# Altium PCB Voltage detect V4.PcbDoc
Units mm, origin at the board's own origin, x right, y up, seen from the top; angles counter-clockwise.
Board outline 95 x 53 mm, 2 copper layers (Top Layer, Bottom Layer); 85 components, 62 nets, 234 pads, 33 vias.
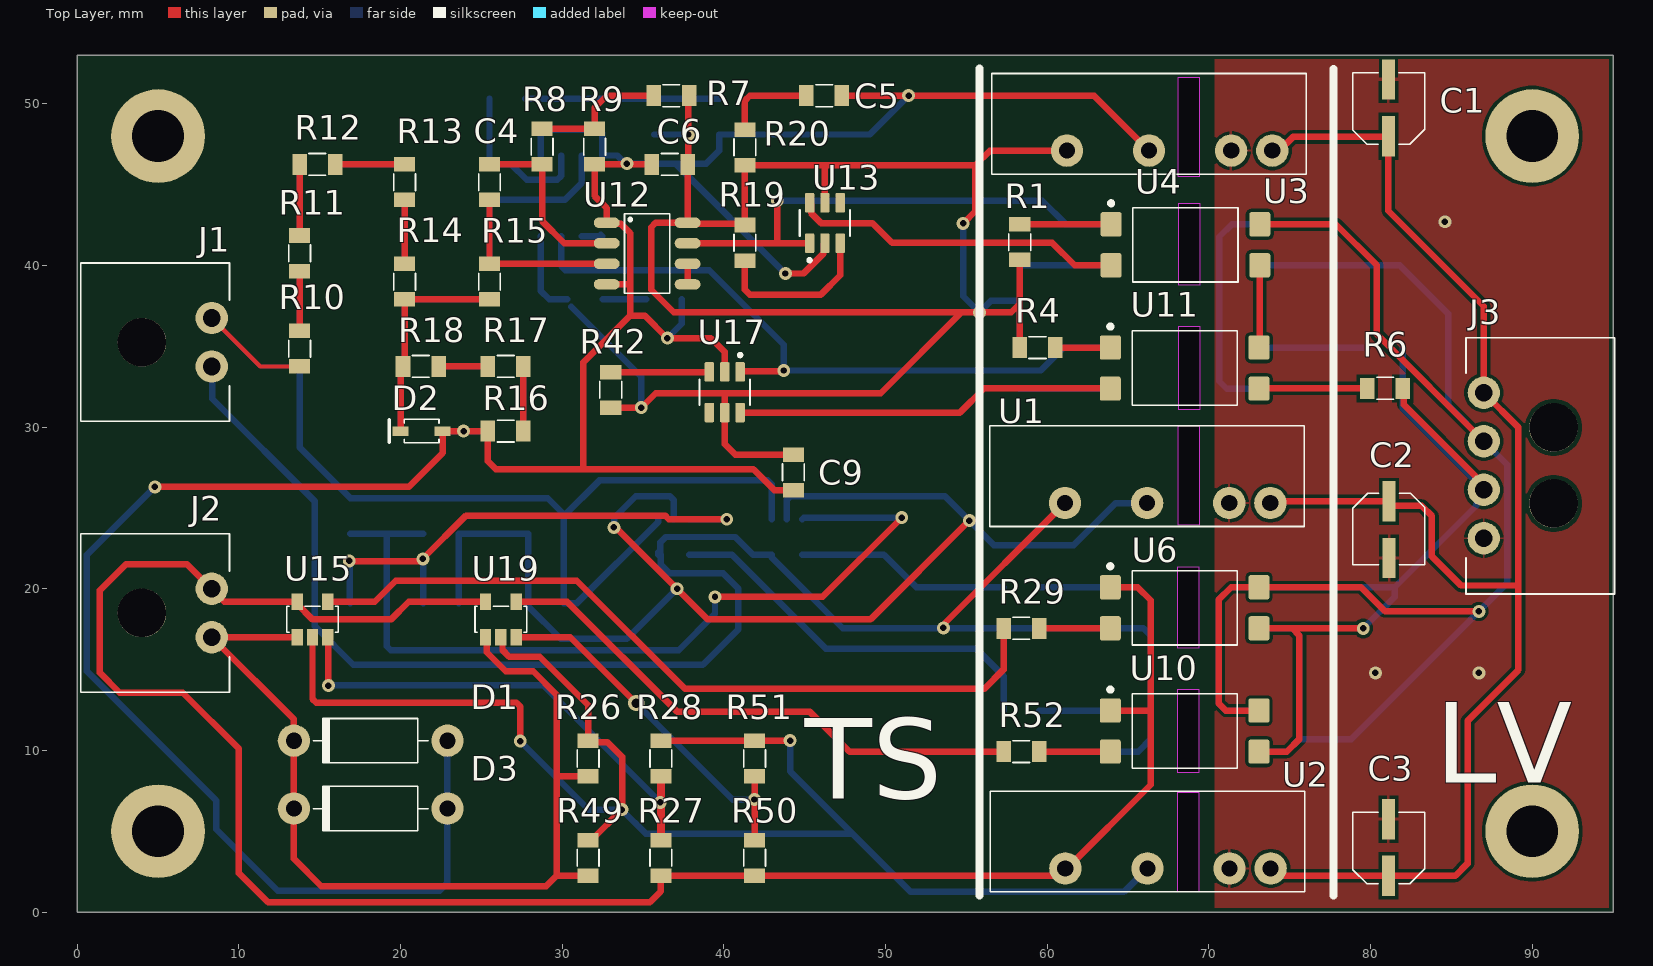
[diagram p0: Top Layer view]
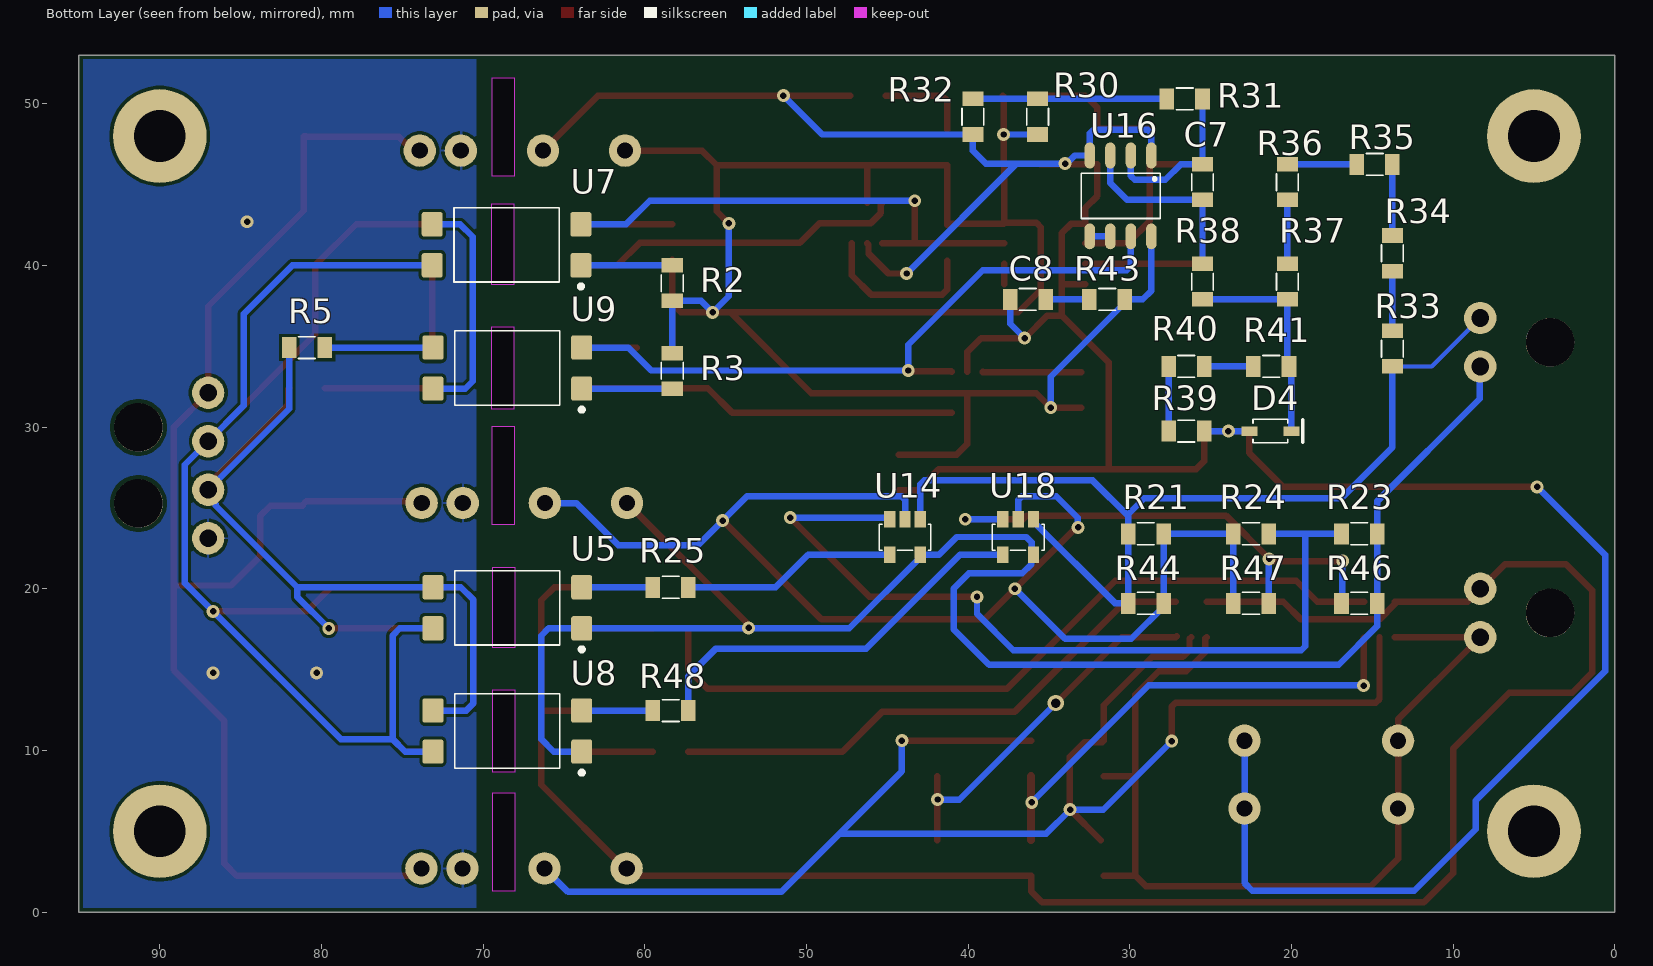
[diagram p1: Bottom Layer view, seen from below]

## Layer stack, top to bottom
Top Solder: solder mask 0.0102, Solder Resist, Dk 3.5
Top Layer: signal copper 0.0356
Dielectric 1: dielectric 0.32, FR-4, Dk 4.8
Bottom Layer: signal copper 0.0356
Bottom Solder: solder mask 0.0102, Solder Resist, Dk 3.5

## Board outline
0,0 0,53 95,53 95,0
cut-out: 68.075,23.95 69.425,23.95 69.425,30.05 68.075,30.05
cut-out: 68.055,16.345 69.405,16.345 69.405,21.345 68.055,21.345
cut-out: 68.055,8.645 69.405,8.645 69.405,13.745 68.055,13.745
cut-out: 68.05,1.275 69.4,1.275 69.4,7.375 68.05,7.375
cut-out: 68.105,31.1 69.455,31.1 69.455,36.2 68.105,36.2
cut-out: 68.105,38.8 69.455,38.8 69.455,43.8 68.105,43.8
cut-out: 68.075,45.525 69.425,45.525 69.425,51.625 68.075,51.625

## Design rules (kind name [scope] priority, off if disabled: settings)
AcuteAngle [All] p1: minimum=3.50000000000000E+0001 checktracksonly=FALSE
BoardOutlineClearance "BoardOutlineClearance 1" [All] p1: gap=0.25 ignorepadtopadclearanceinfootprint=FALSE except(0: Arc-SplitContinuation Track-SplitContinuation SMDPad-SplitContinuation THPad-SplitContinuation Via-SplitContinuation Fill-SplitContinuation Poly-SplitContinuation Region-SplitContinuation Text-SplitContinuation) // Milling
Clearance "Clearance-1 1/2 Oz" [All] p1: gap=0.125 ignorepadtopadclearanceinfootprint=FALSE except(0.2: Arc-Fill Arc-Poly Track-Fill Track-Poly SMDPad-SMDPad SMDPad-Fill SMDPad-Poly THPad-Fill THPad-Poly Via-Fill Via-Poly Fill-Fill Fill-Poly Poly-Poly Poly-Region Poly-Text; 0.25: Arc-Hole Track-Hole SMDPad-Hole THPad-Hole Via-Hole Fill-Hole Poly-Hole Region-Hole Text-Hole) // Standart
ComponentClearance [All] p1: gap=0.1 collisioncheckmode=3 verticalgap=0.1 showdistances=FALSE
DiffPairsRouting "DiffPairsRouting 1/2 Oz" [All] p1: maxlimit=0.254 minlimit=0.125 mostfreqgap=0.254 toplayer_minwidth=0.125 toplayer_maxwidth=0.381 toplayer_prefwidth=0.381 bottomlayer_minwidth=0.125 bottomlayer_maxwidth=0.381 bottomlayer_prefwidth=0.381 maxuncoupledlength=12.7
HoleSize "Minimum HoleSize" [IsPad] p1: absolutevalues=TRUE maxlimit=5.9 minlimit=0.6 maxpercent=80.000 minpercent=20.000
HoleSize "Minimum HoleSize VIA 1" [IsVia] p2: absolutevalues=TRUE maxlimit=5.9 minlimit=0.3 maxpercent=80.000 minpercent=20.000 // Standart
HoleToHoleClearance Hole2HoleClearance [All] p1: gap=0.25 allowstackedmicrovias=FALSE
MinimumAnnularRing "Minimum AR VIA Standart" [All] p1: minimumring=0.15
MinimumAnnularRing "Minimum AR PAD Standart" [All] p2: minimumring=0.2
MinimumSolderMaskSliver "SolderMask Bridge Standart" [All] p1: minsoldermaskwidth=0.15 // All Masks
PlaneClearance "PlaneClearance-1 1/2 Oz" [All] p1: clearance=0.2 // Standart
PlaneConnect "TermalConnect-1 1/2 Oz" [All] p1: planeconnectstyle=Relief reliefexpansion=0.2 reliefentries=4 reliefconductorwidth=0.2 reliefairgap=0.2 // Standart
PolygonConnect "PolygonConnect-1 1/2 Oz" [All] p1: thpad.connectstyle=Relief thpad.reliefconductorwidth=0.15 thpad.reliefentries=4 thpad.polygonreliefangle="90 Angle" thpad.airgapwidth=0.2 smdpad.connectstyle=Relief smdpad.reliefconductorwidth=0.2 smdpad.reliefentries=4 smdpad.polygonreliefangle="90 Angle" smdpad.airgapwidth=0.2 via.connectstyle=Direct via.reliefconductorwidth=0.254 via.reliefentries=4 via.polygonreliefangle="90 Angle" via.airgapwidth=0.254 // Standart
RoutingCorners [All] p1 off: cornerstyle=45-Degree minsetback=2.54 maxsetback=2.54
RoutingVias [All] p1: holewidth=0.4 width=0.8 viastyle="Through Hole" minholewidth=0.3 minwidth=0.6 maxholewidth=5.9 maxwidth=8.9
SilkToSilkClearance Silk2SilkClearance [All] p1 off: silktosilkclearance=0.15
SilkToSolderMaskClearance Silk2SolderMaskClearance [IsPad] p1 off: minsilkscreentomaskgap=0.15 clearancetoexposedcopper=TRUE
SolderMaskExpansion SolderMaskExpansion-1 [All] p1: expansion=0.05 istentingtop=FALSE // Standart
UnRoutedNet [All] p1: checkbadconnections=TRUE
Width "Width 1/2 Oz" [All] p1: maxlimit=10 minlimit=0.125 preferedwidth=0.4 checkconnectedcopper=TRUE
19 further rules are at their usual default settings.

## Classes and differential pairs
channel class "Voltage detectV2": Primary Secondary
component class main: C1 C2 C3 J1 J2 J3 R1 R2 R3 R4 R5 R6 U1 U2 U3 U4 U5 U6 U7 U8 U9 U10 U11
component class Secondary: C7 C8 C9 D3 D4 R30 R31 R32 R33 R34 R35 R36 R37 R38 R39 R40 R41 R42 R43 R44 R46 R47 R48 R49 R50 R51 R52 U16 U17 U18 U19
component class Primary: C4 C5 C6 D1 D2 R7 R8 R9 R10 R11 R12 R13 R14 R15 R16 R17 R18 R19 R20 R21 R23 R24 R25 R26 R27 R28 R29 U12 U13 U14 U15

## Components (designator, comment, footprint, x,y, rotation, side; value= is the part's Value field where it differs from the comment)
C1 "4.7uF" "Bar Cap 4x5.4" 81.1,51.5 r0 top (schematic designator C5)
C2 "4.7uF" "Bar Cap 4x5.4" 81.15,21.9 r180 top (schematic designator C6)
C3 "4.7uF" "Bar Cap 4x5.4" 81.1,5.75 r0 top (schematic designator C4)
C4 "10nF" "0805 Capicator" 25.5,45.15 r90 top (schematic designator C1)
C5 "0.1uF" "0805 Capicator" 46.2,50.5 r0 top (schematic designator C2)
C6 "0.1uF" "0805 Capicator" 36.65,46.25 r180 top (schematic designator C3)
C7 "10nF" "0805 Capicator" 25.5,45.15 r90 bottom (schematic designator C1)
C8 "0.1uF" "0805 Capicator" 36.3,37.9 r0 bottom (schematic designator C2)
C9 "0.1uF" "0805 Capicator" 44.3,27.2 r270 top (schematic designator C3)
D1 "Diode" DO-41 22.9,10.6 r180 top
D2 "Zener 12V" sod-323 22.6,29.75 r180 top
D3 "Diode" DO-41 22.9,6.4 r180 top (schematic designator D1)
D4 "Zener 12V" sod-323 22.6,29.75 r180 bottom (schematic designator D2)
J1 "MicroFit 2x1" "MolexMicroFit 2x1" 8.32,36.75 r270 top
J2 "MicroFit 2x1" "MolexMicroFit 2x1" 8.32,20 r270 top
J3 "MicroFit 4x1" "MolexMicroFit 4x1" 87.005,32.125 r90 top
R1 "100R" "0805 Resistor" 58.3,41.445 r270 top (schematic designator R15)
R2 "100R" "0805 Resistor" 58.3,38.905 r270 bottom (schematic designator R3)
R3 "100R" "0805 Resistor" 58.3,33.48 r90 bottom (schematic designator R16)
R4 "100R" "0805 Resistor" 59.4,34.92 r180 top (schematic designator R17)
R5 "1k" "0805 Resistor" 80.9,34.92 r0 bottom (schematic designator R27)
R6 "2.4k" "0805 Resistor" 80.9,32.4 r0 top (schematic designator R28)
R7 "75k" "0805 Resistor" 36.75,50.5 r180 top (schematic designator R1)
R8 "100R" "0805 Resistor" 28.75,47.35 r270 top (schematic designator R2)
R9 "200k" "0805 Resistor" 32,47.35 r90 top (schematic designator R4)
R10 "200k" "0805 Resistor" 13.75,34.85 r90 top (schematic designator R5)
R11 "200k" "0805 Resistor" 13.75,40.75 r90 top (schematic designator R6)
R12 "200k" "0805 Resistor" 14.85,46.25 r0 top (schematic designator R7)
R13 "200k" "0805 Resistor" 20.25,45.15 r270 top (schematic designator R8)
R14 "200k" "0805 Resistor" 20.25,39 r270 top (schematic designator R9)
R15 "100R" "0805 Resistor" 25.5,39 r90 top (schematic designator R10)
R16 "2.4k" "0805 Resistor" 26.5,29.75 r0 top (schematic designator R11)
R17 "24k" "0805 Resistor" 26.5,33.75 r0 top (schematic designator R12)
R18 "24k" "0805 Resistor" 21.25,33.75 r180 top (schematic designator R13)
R19 "1k" "0805 Resistor" 41.3,41.4 r90 top (schematic designator R18)
R20 "1k" "0805 Resistor" 41.3,47.3 r90 top (schematic designator R14)
R21 "1k" "0805 Resistor" 29,23.4 r0 bottom (schematic designator R19)
R23 "1k" "0805 Resistor" 15.8,23.4 r180 bottom (schematic designator R20)
R24 "1k" "0805 Resistor" 22.5,23.4 r180 bottom (schematic designator R21)
R25 "1k" "0805 Resistor" 58.4,20.09 r0 bottom (schematic designator R22)
R26 "1k" "0805 Resistor" 31.6,9.5 r270 top (schematic designator R23)
R27 "1k" "0805 Resistor" 36.1,3.35 r270 top (schematic designator R24)
R28 "1k" "0805 Resistor" 36.1,9.5 r270 top (schematic designator R25)
R29 "1k" "0805 Resistor" 58.4,17.55 r0 top (schematic designator R26)
R30 "75k" "0805 Resistor" 35.7,49.2 r90 bottom (schematic designator R1)
R31 "100R" "0805 Resistor" 26.6,50.3 r180 bottom (schematic designator R2)
R32 "200k" "0805 Resistor" 39.7,49.2 r90 bottom (schematic designator R4)
R33 "200k" "0805 Resistor" 13.75,34.85 r90 bottom (schematic designator R5)
R34 "200k" "0805 Resistor" 13.75,40.75 r90 bottom (schematic designator R6)
R35 "200k" "0805 Resistor" 14.85,46.25 r0 bottom (schematic designator R7)
R36 "200k" "0805 Resistor" 20.25,45.15 r270 bottom (schematic designator R8)
R37 "200k" "0805 Resistor" 20.25,39 r270 bottom (schematic designator R9)
R38 "100R" "0805 Resistor" 25.5,39 r90 bottom (schematic designator R10)
R39 "2.4k" "0805 Resistor" 26.5,29.75 r0 bottom (schematic designator R11)
R40 "24k" "0805 Resistor" 26.5,33.75 r0 bottom (schematic designator R12)
R41 "24k" "0805 Resistor" 21.25,33.75 r180 bottom (schematic designator R13)
R42 "1k" "0805 Resistor" 33,32.3 r270 top (schematic designator R18)
R43 "1k" "0805 Resistor" 31.4,37.9 r0 bottom (schematic designator R14)
R44 "1k" "0805 Resistor" 29,19.1 r0 bottom (schematic designator R19)
R46 "1k" "0805 Resistor" 15.8,19.1 r180 bottom (schematic designator R20)
R47 "1k" "0805 Resistor" 22.5,19.1 r180 bottom (schematic designator R21)
R48 "1k" "0805 Resistor" 58.4,12.465 r0 bottom (schematic designator R22)
R49 "1k" "0805 Resistor" 31.6,3.35 r270 top (schematic designator R23)
R50 "1k" "0805 Resistor" 41.9,3.35 r270 top (schematic designator R24)
R51 "1k" "0805 Resistor" 41.9,9.5 r270 top (schematic designator R25)
R52 "1k" "0805 Resistor" 58.4,9.925 r0 top (schematic designator R26)
U1 "DC/DC" SIP7 73.8,25.3 r270 top
U2 "DC/DC" SIP7 73.82,2.7 r270 top
U3 "DC/DC" SIP7 73.92,47.1 r270 top (schematic designator U4)
U4 "Opt" FAIR-MDIP-4_V 68.55,41.275 r0 top (schematic designator U7)
U5 "Opt" FAIR-MDIP-4_V 68.5,18.82 r0 bottom (schematic designator U9)
U6 "Opt" FAIR-MDIP-4_V 68.5,18.82 r0 top (schematic designator U10)
U7 "Opt" FAIR-MDIP-4_V 68.55,41.275 r0 bottom (schematic designator U6)
U8 "Opt" FAIR-MDIP-4_V 68.5,11.195 r0 bottom (schematic designator U13)
U9 "Opt" FAIR-MDIP-4_V 68.5,33.65 r0 bottom (schematic designator U12)
U10 "Opt" FAIR-MDIP-4_V 68.5,11.195 r0 top (schematic designator U14)
U11 "Opt" FAIR-MDIP-4_V 68.5,33.65 r0 top (schematic designator U15)
U12 "Comp" SOIC-8 32.75,42.64 r0 top (schematic designator U3)
U13 "Inv" SOT236 46.25,42.625 r90 top (schematic designator U5)
U14 "Comparator [LMV]" SOT-23-5 43.9,24.3 r0 bottom (schematic designator U8)
U15 "Comparator [LMV]" SOT-23-5 14.55,17 r0 top (schematic designator U11)
U16 "Comp" SOIC-8 28.66,46.8 r270 bottom (schematic designator U3)
U17 "Inv" SOT236 40.05,32.155 r270 top (schematic designator U5)
U18 "Comparator [LMV]" SOT-23-5 36.9,24.3 r0 bottom (schematic designator U8)
U19 "Comparator [LMV]" SOT-23-5 26.2,17 r0 top (schematic designator U11)

## Footprints (in the part's own frame and the unit in brackets; to place one, negate y for a bottom-side part, rotate by r counter-clockwise, add the part's x,y. Pads: shape width x height; smd on the part's side, far side on the other; paste and mask are expansions set on the pad)
"0805 Capicator" [mm]
  rect 0.9x1.3 smd: 1(-1.1,0) 2(1.1,0)
  silkscreen extent -0.53,-0.67 0.53,0.67, body extent -1.05,-0.67 1.05,0.68, height 0.75
"0805 Resistor" [mm]
  rect 0.9x1.3 smd: 1(-1.1,0) 2(1.1,0)
  silkscreen extent -0.53,-0.67 0.53,0.67, body extent -1.05,-0.67 1.05,0.68, height 0.6
"Bar Cap 4x5.4" [mm]
  rect 0.8x2.5 smd: 1(0,0) 2(0,-3.5)
  silkscreen extent -2.2,-4 2.25,0.43, body extent -2.15,-4.3 2.15,0.7, height 5.4
DO-41 [mm]
  round 2 hole 1: 1(0,0) 2(9.5,0)
  silkscreen extent 1.2,-1.38 8.3,1.38, body extent -0.39,-1.35 9.99,1.35, height 2.83
FAIR-MDIP-4_V [mm]
  rrect20% 1.3x1.5 smd: 1(-4.6,1.27) 2(-4.6,-1.27) 3(4.6,-1.27) 4(4.6,1.27)
  silkscreen extent -4.72,-2.3 3.25,2.69, body extent -5.08,-2.3 5.08,2.3, height 3.85
"MolexMicroFit 2x1" [mm]
  round 2 hole 1.1: 1(3,0) 2(0,0)
  round 3 hole 3: A(1.5,-4.32)
  silkscreen extent -3.4,-8.1 6.4,1.1, body extent -3.33,-8.9 6.33,1, height 5.64
"MolexMicroFit 4x1" [mm]
  round 2 hole 1.1: 1(0,0) 2(-3,0) 3(-6,0) 4(-9,0)
  round 3 hole 3: A(-6.85,-4.32) A(-2.15,-4.32)
  silkscreen extent -12.45,-8.1 3.4,1.1, body extent -12.35,-8.87 3.3,1.03, height 5.64
SIP7 [mm]
  round 2 hole 1: 1(0,0) 2(0,-2.54) 4(0,-7.62) 6(0,-12.7)
  silkscreen extent -4.77,-17.35 1.45,2.1, body extent -4.7,-17.27 1.39,2.03, height 10.16
sod-323 [mm]
  rect 1x0.6 smd: 1(0,0) 2(2.6,0)
  silkscreen extent 0.23,-0.72 3.3,0.72, body extent 0.03,-0.68 2.63,0.67, height 1.1
SOIC-8 [mm]
  oval 1.6x0.65 smd: 1(0,0) 2(0,-1.27) 3(0,-2.54) 4(0,-3.81) 5(5,-3.81) 6(5,-2.54) 7(5,-1.27) 8(5,0)
  silkscreen extent 1.1,-4.35 3.9,0.55, body extent -0.36,-4.35 5.41,0.55, height 1.45
SOT236 [mm]
  rrect25% 1.21x0.58 smd: 1(-1.255,0.95) 2(-1.255,0) 3(-1.255,-0.95) 4(1.255,-0.95) 5(1.255,0) 6(1.255,0.95)
  silkscreen extent -2.4,-1.56 0.8,1.56, body extent -1.4,-1.45 1.4,1.45, height 1.45
SOT-23-5 [mm]
  rect 0.7x1 smd mask+0.045: 1(-0.95,0) 2(0,0) 3(0.95,0) 4(0.95,2.2) 5(-0.95,2.2)
  silkscreen extent -1.6,0.3 1.6,1.92, body extent -1.5,-0.15 1.5,2.35, height 1.1

## Part data
C1 C2 C3: library part "Cap Pol 4.7uF", "ECAP SMD,  35V, 105°C", Manufacturer=Epcos, Part Number=B41121A7475M000, ComponentLink1Description=Chip&Dip, ComponentLink1URL=https://www.chipdip.ru/product/b41121a7475m000, Type=Capacitor
C4 C7: library part "Cap 10nF (0805)", "0805 X7R 10nF 100V 10%", Manufacturer="Murata Manufacturing", Part Number=GRM21BR72A103KA01L, ComponentLink1Description=Chip&Dip, ComponentLink1URL=https://www.chipdip.ru/product/grm21br72a103ka01l, Type=Capacitor
C5 C6 C8 C9: library part "Cap 0.1uF (0805)", "0.1uF X7R 25V 10% 0805", Manufacturer="Murata Manufacturing", Part Number=GRM21BR71E104KA01L, ComponentLink1Description=Chip&Dip, ComponentLink1URL=https://www.chipdip.ru/product/grm21br71e104ka01l, Type=Capacitor
D1 D3: library part "Diode HV [EM5]", "Highg voltage diode - 2000V", Manufacturer=China, Part Number=EM518, ComponentLink1Description=ChipDip, ComponentLink1URL=https://www.chipdip.ru/product/em518, ComponentLink2Description=Datasheet, ComponentLink2URL=https://static.chipdip.ru/lib/004/DOC001004767.pdf, Type=Diode
D2 D4: library part "Zener Diode 12V", "300mW", Manufacturer="NXP Semiconductor", Part Number=BZX384-C12,115, ComponentLink1Description=Chip&Dip, ComponentLink1URL=https://www.chipdip.ru/product/bzx384-c12.115, ComponentLink2Description=DataSheet, ComponentLink2URL=https://static.chipdip.ru/lib/583/DOC001583013.pdf, Type=Diode
J1 J2: library part "Conn 2 [MicroFit]", "Micro-Fit 3.0 Right-Angle Header, 3.00mm Pitch, Single Row, 2 Circuits, with Snap-in Plastic Peg PCB Lock, Tin, Glow-Wire Capable, Black", Manufacturer=Molex, Part Number=436500200, ComponentLink1Description=Molex, ComponentLink1URL=https://www.molex.com/molex/products/part-detail/pcb_headers/0436500200, Type=Connector
J3: library part "Conn 4 [MicroFit]", "Micro-Fit 3.0 Right-Angle Header, 3.00mm Pitch, Single Row, 4 Circuits, with Snap-in Plastic Peg PCB Lock, Tin, Glow-Wire Capable, Black", Manufacturer=Molex, Part Number=436500400, ComponentLink1Description=Molex, ComponentLink1URL=https://www.molex.com/molex/products/part-detail/pcb_headers/0436500400, Type=Connector
R1 R2 R3 R4 R8 R15 R31 R38: library part "Res 100R (0805)", "0.125W 0805 100R, 1%", Manufacturer=Taiwan, Part Number=RC0805FR-07100RL, ComponentLink1Description=Chip&Dip, ComponentLink1URL=https://www.chipdip.ru/product0/9000079462, Type=Resistor
R5 R19 R20 R21 R23 R24 R25 R26 R27 R28 R29 R42 R43 R44 R46 R47 R48 R49 R50 R51 R52: library part "Res 1k (0805)", "0.125W 0805 1k, 1%", Manufacturer=Taiwan, Part Number=RC0805FR-071KL, ComponentLink1Description=Chip&Dip, ComponentLink1URL=https://www.chipdip.ru/product0/9000079486, Type=Resistor
R6 R16 R39: library part "Res 2.4k (0805)", "0.125W 0805 2.4k, 1%", Manufacturer=Taiwan, Part Number=RC0805FR-072K4L, ComponentLink1Description=Chip&Dip, ComponentLink1URL=https://www.chipdip.ru/product0/9000079495, Type=Resistor
R7 R30: library part "Res 75k (0805)", "0.125W 0805 75k, 1%", Manufacturer=Taiwan, Part Number=RC0805FR-0775KL, ComponentLink1Description=Chip&Dip, ComponentLink1URL=https://www.chipdip.ru/product0/9000079535, Type=Resistor
R9 R10 R11 R12 R13 R14 R32 R33 R34 R35 R36 R37: library part "Res 200k (0805)", "0.125W 0805 200k, 1%", Manufacturer=Taiwan, Part Number=RC0805FK-07200KL, ComponentLink1Description=Chip&Dip, ComponentLink1URL=https://www.chipdip.ru/product0/914213016, Type=Resistor
R17 R18 R40 R41: library part "Res 24k (0805)", "0.125W 0805 24k, 1%", Manufacturer=Taiwan, Part Number=RC0805FR-0724KL, ComponentLink1Description=Chip&Dip, ComponentLink1URL=https://www.chipdip.ru/product0/9000079523, Type=Resistor
U1 U2 U3: library part "DC/DC Isolated 24V-5V [TMH]", "The TMH series are ultra miniature, isolated 2 Watt DC/DC-converters in a Single-in-Line  package  (SIP)", Manufacturer="Traco Power", Part Number=TMH2405S, ComponentLink1Description=Chip&Dip, ComponentLink1URL=https://www.chipdip.ru/product/tmh-2405s, ComponentLink2Description=DataSheet, ComponentLink2URL=https://static.chipdip.ru/lib/005/DOC001005854.pdf, Type=IC
U4 U5 U6 U7 U8 U9 U10 U11: library part "Optocoupler [FOD817B]", "Phototransistor Optocoupler, 4 us Rise, 3 us Fall, 5000 Vrms, -55 to 110 degC, 4-Pin MDIP, RoHS, Tape and Reel", Manufacturer="ON Semiconductor", Part Nomber=FOD817B, ComponentLink1Description=Chip&Dip, ComponentLink1URL=https://www.chipdip.ru/product/fod817b, ComponentLink2Description=DataSheet, ComponentLink2URL=https://static.chipdip.ru/lib/297/DOC000297284.pdf
U12 U16: library part "Comparator [LM3]", "Differential comparator with strobes", Manufacturer="Texas Instruments", Part Number=LM311DR, ComponentLink1Description=DataSheet, ComponentLink1URL=https://static.chipdip.ru/lib/222/DOC000222396.pdf, ComponentLink2Description=Chip&Dip, ComponentLink2URL=https://www.chipdip.ru/product/lm311d, Type=IC
U13 U17: library part "Inverter (SN74)", "Dual inverter, 1.65-5.5V", Manufacturer="Texas Instruments", Part Number=SN74LVC2G04DBVR, ComponentLink1Description=Chip&Dip, ComponentLink1URL=https://www.chipdip.ru/product/sn74lvc2g04dbvr-2, ComponentLink2Description=DataSheet, ComponentLink2URL=https://static.chipdip.ru/lib/021/DOC001021810.pdf, Type=IC
U14 U15 U18 U19: "Differential comparator with strobes", Manufacturer="Texas Instruments", Part Number=LMV331M5/NOPB, ComponentLink1Description=DataSheet, ComponentLink1URL=https://static.chipdip.ru/lib/291/DOC000291302.pdf, ComponentLink2Description=Chip&Dip, ComponentLink2URL=https://www.chipdip.ru/product/lmv331m5-nopb, Type=IC

## Free pads (board coordinates)
  round 5.8 hole 3.2: A(5,5) A(5,48) A(90,5) A(90,48)

## Via types
v1: diameter 0.8, hole 0.4, Top Layer to Bottom Layer, tented both sides, 32 vias
v2: diameter 1, hole 0.6, Top Layer to Bottom Layer, 1 vias

## Nets (pads, with @x,y where several pads share a name; then routed paths per layer and width w, separated by ;. In a path a pad name is that pad's centre, name@x,y a point inside that pad or via, vN(x,y) a via of type N, cw(c..) or ccw(c..) an arc to the next point about the centre after c; other vN are vias at no path point)
5V: C6.1 C9.1 R1.2 R2.2 R3.2 R4.2 R7.1 R19.2 R20.1 R30.1 R42.2 R43.1 U3.6 U12.8 U13.5 U16.8 U17.5 | length 136.2
  Top Layer w0.4: R42.2 v1(34.888,31.2) 35.788,32.1 40.05,32.1 ; R7.1 37.8,50.45 v1(37.8,48.1) 37.8,46.3 C6.1 U12.8 ; C9.1 40.7,28.3 40.05,28.95 U17.5 40.05,32.1 ; U13.5 46.25,46.1 46.15,46.2 ; v1(54.8,42.6) 55.554,43.354 55.554,46.2 ; R4.2@58.28,34.9 R4.2 58.3,37.633 ; R1.2 58.3,37.633 ; U3.6 56.454,47.1 55.554,46.2 ; U12.8 37.798,42.592 41.208,42.592 R19.2 R20.1 46.15,46.2 ; U12.8 35.774,42.64 35.5,42.366 35.5,38.5 36.9,37.1 54.7,37.1 ; 40.05,32.1 49.7,32.1 54.7,37.1 ; 46.15,46.2 55.554,46.2 ; 54.7,37.1 v1(55.8,37.1) 57.767,37.1 58.3,37.633
  Bottom Layer w0.4: U16.8@28.708,41.848 U16.8 28.66,38.44 29.2,37.9 R43.1 ; R43.1@30.55,37.45 34.888,33.112 v1(34.888,31.2) ; R30.1 v1(37.8,48.1) ; v1(54.8,42.6) 54.8,38.1 v1(55.8,37.1) 55.804,37.1 56.509,37.805 R2.2 R3.2
"24V IN": C1.2 C2.2 C3.2 J3.1 U1.1 U2.1 U3.1 | length 88.3
  Top Layer w0.4: U2.1 74.253,2.7 74.703,2.25 C3.2 85.25,2.25 86,3 86,11.825 89.15,14.975 89.15,20.2 ; U3.1 74.353,47.1 75.203,47.95 80.9,47.95 80.95,48 C1.2 81.1,43.375 87.005,37.47 J3.1 89.15,29.98 89.15,20.2 ; U1.1@74.36,25.4 80.95,25.4 81.15,25.2 81.15,25.125 83.175,25.125 83.8,24.5 83.8,22 85.6,20.2 89.15,20.2
Con1_1: J1.2 R10.1 R21.2 R33.1 R44.2 U14.1 U18.1 | length 66
  Top Layer w0.254: J1.2 11.32,33.75 R10.1
  Bottom Layer w0.254: J1.2 11.32,33.75 R33.1
  Bottom Layer w0.4: R33.1 13.75,28.75 16.9,25.6 29.1,25.6 30.1,24.6 30.1,24.5 ; U18.1 35.95,24.15 30.916,19.116 30.116,19.116 R44.2 R21.2 30.1,24.5 ; U14.1 42.95,26.466 42.716,26.7 32.3,26.7 30.1,24.5
Con1_2: J1.1 R23.2 R46.2 U1.6 U5.1 U8.1 U14.5 U18.5 | length 109
  Top Layer w0.4: v1(53.575,17.575) 53.575,17.775 U1.6
  Bottom Layer w0.4: J1.1@8.35,33.225 8.35,31.75 14.7,25.4 R23.2 R46.2 14.7,17.675 17.075,15.3 38.7,15.3 40.9,17.5 40.9,20 39.946,20.954 36.646,20.954 36.1,21.5 36.1,22.1 U18.5@36.025,22.175 ; U18.5 U18.5@36.025,22.175 ; U18.5@35.95,22.25 U18.5@36.025,22.175 ; U8.1 65.625,9.925 66.4,10.7 66.4,17.1 65.95,17.55 U5.1 47.35,17.55 42.95,21.95 U14.5 41.8,22.1 40.7,23.2 36.4,23.2 36.074,22.874 36.074,22.224 U18.5@36.025,22.175
Con2_1: D1.2 D3.2 J2.1 R26.2 R49.2 U15.1 U19.1 | length 59.7
  Top Layer w0.4: J2.1 J2.1@8.5,17 ; U15.1 J2.1@8.5,17 ; U19.1 25.324,16.926 25.324,16.076 26.5,14.9 28.2,14.9 29.65,13.45 29.65,2.25 ; 29.675,8.4 R26.2 ; R49.2 29.65,2.25 ; J2.1@8.5,17 8.5,16.82 13.4,11.92 D1.2 D3.2 13.4,3.3 15.1,1.6 29,1.6 29.65,2.25
Con2_2: J2.2 R27.2 R50.2 U2.6 U6.1 U10.1 U15.5 U19.5 | length 127.3
  Top Layer w0.4: U19.5 20.508,19.2 19.408,18.1 14.55,18.1 13.6,19.05 U15.5 9.1,19.2 8.32,19.98 J2.2 8.3,20 6.775,21.525 3.025,21.525 1.4,19.9 1.4,14.8 2.625,13.575 6.525,13.575 10,10.1 10,2.4 11.8,0.6 35.425,0.6 36.1,1.275 R27.2 R50.2 60.337,2.25 60.787,2.7 61.22,2.7 66.4,7.88 66.4,12.465 ; U10.1 66.4,12.465 ; U6.1 65.59,20.09 66.4,19.28 66.4,12.465
"DC/DC GND": C1.1 C2.1 C3.1 J3.4 U1.2 U2.2 U3.2
  other v1: 80.3,14.8 86.7,14.8 84.6,42.7
GND: C5.2 C6.2 C8.2 C9.2 D1.1 D2.1 D3.1 D4.1 R9.1 R16.1 R32.1 R39.1 U3.4 U12.1 U12.4 U13.2 U16.1 U16.4 U17.2 | length 197.1
  Top Layer w0.4: v1(4.8,26.3) 20.5,26.3 22.6,28.4 D2.1 v1(23.9,29.75) R16.1 25.4,27.9 25.9,27.4 31.3,27.4 ; U12.4 34.2,38.83 ; 34.2,37.743 34.2,36.9 ; 34.2,37.8 34.2,38.83 ; C6.2 R9.1 32,44.3 32.75,43.55 U12.1 32.798,42.592 33.608,42.592 34.2,42 34.2,38.83 ; U17.2 40.05,34.65 39.2,35.5 v1(36.5,35.5) 35.1,36.9 34.2,36.9 ; v1(43.8,39.5) 44.925,39.5 46.16,40.735 46.16,41.28 U13.2 ; C9.2 43.125,26.1 41.825,27.4 31.3,27.4 ; C5.2 62.9,50.5 U3.4 ; 31.3,27.4 31.3,34 34.2,36.9
  Bottom Layer w0.4: v1(4.8,26.3) 0.6,22.1 0.6,14.9 8.6,6.9 8.6,5.125 12.4,1.325 22.425,1.325 22.9,1.8 D3.1 D1.1 ; D4.1 v1(23.9,29.75) ; v1@24,29.75 R39.1 ; U16.1 28.66,48.166 28.894,48.4 32.236,48.4 32.47,48.166 U16.4 33.395,46.8 33.895,46.3 v1(34,46.3) 37,46.3 ; v1(36.5,35.5) 37.4,36.4 C8.2 ; v1(43.8,39.5) 37,46.3 ; v1(51.425,50.5) 49.025,48.1 R32.1 39.7,47.1 38.9,46.3 37,46.3
GND_1: R26.1 R28.1 R49.1 R51.1 U2.4 U15.2 U19.2 | length 95.8
  Top Layer w0.4: U15.2 14.55,13.184 14.784,12.95 27.166,12.95 27.4,12.716 v1(27.4,10.575) ; U19.2 26.304,16.896 26.304,16.206 26.71,15.8 28.6,15.8 31.6,12.8 R26.1 31.7,10.5 32.8,10.5 33.7,9.6 33.7,6.35 R49.1@31.8,4.45 ; R28.1 R51.1 v1(44.1,10.6)
  Bottom Layer w0.4: v1(27.4,10.575) 31.638,6.338 v1(33.687,6.338) 35.175,4.85 47.95,4.85 ; v1(44.1,10.6) 44.1,8.7 46.4,6.4 47.95,4.85 ; U2.4 64.746,1.246 51.554,1.246 47.95,4.85
GND_2: R21.1 R24.1 R44.1 R47.1 U1.4 U14.2 U18.2 | length 83.3
  Top Layer w0.4: v1(33.2,23.8) 33.3,23.8 39,18.1 49.066,18.1 v1(55.183,24.217)
  Bottom Layer w0.4: R47.1 R24.1 R21.1 27.9,18.9 29.9,16.9 34,16.9 v1(37.1,20) ; v1(33.2,23.8) 33.22,23.82 33.22,24.395 34.55,25.725 36.666,25.725 36.9,25.491 U18.2 ; U14.2 43.9,25.5 44.134,25.734 53.666,25.734 v1(55.183,24.217) 56.7,22.7 61.645,22.7 64.245,25.3 U1.4
NetC4_1: C4.1 R15.2 U12.3 | length 11.2
  Top Layer w0.4: C4.1 R15.2 U12.3
NetC4_2: C4.2 R8.2 U12.2 | length 11.3
  Top Layer w0.4: C4.2 R8.2 28.75,42.75 30.13,41.37 U12.2
NetC5_1: C5.1 R20.2 | length 5.7
  Top Layer w0.4: R20.2 41.3,50.2 41.6,50.5 C5.1
NetC7_1: C7.1 R38.2 U16.3 | length 11.8
  Bottom Layer w0.4: R38.2 C7.1 30.15,44.05 31.2,45.1 U16.3
NetC7_2: C7.2 R31.2 U16.2 | length 10.2
  Bottom Layer w0.4: R31.2 C7.2 26.85,46.25 27.8,45.3 29.696,45.3 29.93,45.534 U16.2
NetC8_1: C8.1 R43.2 | length 2.7
  Bottom Layer w0.4: R43.2 C8.1
NetD2_2: D2.2 R14.2 R15.1 R18.2 | length 13.7
  Top Layer w0.4: D2.2 20,33.75 R18.2 20.25,33.75 R14.2 R15.1
NetD4_2: D4.2 R37.2 R38.1 R41.2 | length 13.6
  Bottom Layer w0.4: D4.2 20,33.6 R41.2 ; R41.2@20.075,33.675 20.25,33.85 R37.2 R38.1
NetR1_1: R1.1 U4.1 | length 5.6
  Top Layer w0.4: R1.1 U4.1
NetR2_1: R2.1 U7.1 | length 5.6
  Bottom Layer w0.4: R2.1 U7.1
NetR3_1: R3.1 U9.1 | length 5.6
  Bottom Layer w0.4: R3.1 U9.1
NetR4_1: R4.1 U11.1 | length 3.4
  Top Layer w0.4: R4.1 U11.1
NetR5_1: R5.1 U9.3 | length 6.7
  Bottom Layer w0.4: U9.3 R5.1
NetR6_1: R6.1 U11.3 | length 6.7
  Top Layer w0.4: U11.3 73.12,32.4 R6.1
NetR7_2: R7.2 R8.1 R9.2 | length 8.5
  Top Layer w0.4: R8.1 R9.2 32,49.75 32.75,50.5 R7.2
NetR10_2: R10.2 R11.1 | length 3.7
  Top Layer w0.4: R10.2 R11.1
NetR11_2: R11.2 R12.1 | length 4.4
  Top Layer w0.4: R11.2 R12.1
NetR12_2: R12.2 R13.1 | length 4.3
  Top Layer w0.4: R12.2 R13.1
NetR13_2: R13.2 R14.1 | length 3.9
  Top Layer w0.4: R14.1 R13.2
NetR16_2: R16.2 R17.2 | length 4
  Top Layer w0.4: R16.2 R17.2
NetR17_1: R17.1 R18.1 | length 3
  Top Layer w0.4: R18.1 R17.1
NetR19_1: R19.1 U13.3 | length 10.3
  Top Layer w0.4: R19.1 41.3,38.5 41.6,38.2 46,38.2 47.2,39.4 U13.3
NetR25_1: R25.1 U14.4 | length 13.3
  Bottom Layer w0.4: U14.4 49.9,22.1 51.91,20.09 R25.1
NetR29_1: R29.1 U15.4 | length 48.2
  Top Layer w0.4: U15.4 18.4,19.2 19.7,20.5 30.9,20.5 37.6,13.8 56.1,13.8 57.3,15 R29.1
NetR30_2: R30.2 R31.1 R32.2 | length 12
  Bottom Layer w0.4: R31.1 R30.2 R32.2
NetR33_2: R33.2 R34.1 | length 3.7
  Bottom Layer w0.4: R33.2 R34.1
NetR34_2: R34.2 R35.1 | length 4.4
  Bottom Layer w0.4: R34.2 R35.1
NetR35_2: R35.2 R36.1 | length 4.3
  Bottom Layer w0.4: R35.2 R36.1
NetR36_2: R36.2 R37.1 | length 3.9
  Bottom Layer w0.4: R37.1 R36.2
NetR39_2: R39.2 R40.2 | length 4
  Bottom Layer w0.4: R39.2 R40.2
NetR40_1: R40.1 R41.1 | length 3
  Bottom Layer w0.4: R41.1 R40.1
NetR42_1: R42.1 U17.3 | length 6.1
  Top Layer w0.4: R42.1 33.005,33.405 39.095,33.405 U17.3
NetR48_1: R48.1 U18.4 | length 24.7
  Bottom Layer w0.4: U18.4 40.5,22.1 46.3,16.3 55.6,16.3 57.3,14.6 R48.1
NetR52_1: R52.1 U19.4 | length 34
  Top Layer w0.4: U19.4 30.3,19.2 37.1,12.4 45.3,12.4 47.775,9.925 R52.1
NetU4_3: U4.3 U11.4 | length 5.1
  Top Layer w0.4: U11.4 73.15,34.97 U4.3
NetU7_3: U7.3 U9.4 | length 14.4
  Bottom Layer w0.4: U9.4@73.15,32.38 U9.4 71.1,32.38 70.65,32.83 70.65,41.77 71.425,42.545 U7.3
NetU12_5: U12.5 U12.6 | length 1.3
  Top Layer w0.4: U12.5 U12.6
NetU16_5: U16.5 U16.6 | length 1.4
  Bottom Layer w0.4: U16.6 U16.5 U16.5@32.37,41.9
Opt1_P: U7.2 U12.7 U13.1 | length 31.4
  Top Layer w0.4: U12.7 43.3,41.37 ; v1(43.3,44) 43.3,41.37 ; U13.1 43.3,41.37
  Bottom Layer w0.4: v1(43.3,44) 59.7,44 61.155,42.545 U7.2
Opt1_S: U9.2 U16.7 U17.1 | length 42.7
  Top Layer w0.4: U17.1 41.045,33.455 43.655,33.455 v1(43.7,33.5)
  Bottom Layer w0.4: U16.7 29.93,39.97 30.2,39.7 39.1,39.7 43.7,35.1 v1(43.7,33.5) 59.6,33.5 61.02,34.92 U9.2
Opt2_P: U4.2 U13.6 | length 20.6
  Top Layer w0.4: U13.6 45.39,43.79 45.39,43.245 46.013,42.623 49.177,42.623 50.4,41.4 60.3,41.4 61.695,40.005 U4.2
Opt2_S: U11.2 U17.6 | length 23.5
  Top Layer w0.4: U17.6 54.6,30.9 56.1,32.4 63.88,32.4 U11.2
Opt3_Out_P: R25.2 U5.2 | length 4.4
  Bottom Layer w0.4: R25.2 U5.2
Opt3_Out_S: R48.2 U8.2 | length 4.4
  Bottom Layer w0.4: R48.2 U8.2
Opt4_Out_P: R29.2 U6.2 | length 4.4
  Top Layer w0.4: R29.2 U6.2
Opt4_Out_S: R52.2 U10.2 | length 4.4
  Top Layer w0.4: R52.2 U10.2
REF_1_Primary: R27.1 R28.2 U15.3 | length 30.5
  Top Layer w0.254: U15.3 U15.3@15.519,16.981 ; v1@15.519,14.031 v1(15.537,14.012)
  Top Layer w0.4: v1@15.519,14.031 U15.3@15.519,16.981
  Top Layer w0.5: R27.1 R28.2
  Bottom Layer w0.4: v1@15.55,14.025 28.825,14.025 v1(36.062,6.787)
REF_1_Secondary: R50.1 R51.2 U19.3 | length 22.9
  Top Layer w0.4: U19.3@27.1,17.05 U19.3 30.5,17 v2(34.575,12.925) ; R50.1 R51.2
  Bottom Layer w0.4: v2(34.575,12.925) 40.55,6.95 v1@41.875,6.95
  other v1: 41.887,6.962
REF_2_Primary: R23.1 R24.2 U14.3 | length 53.6
  Top Layer w0.4: v1(39.45,19.5) 46.1,19.5 v1(51,24.4)
  Bottom Layer w0.4: R23.1 19.15,23.4 ; R24.2 19.15,23.4 ; v1(39.45,19.5) 39.45,18.45 37.2,16.2 19.384,16.2 19.15,16.434 19.15,23.4 ; U14.3 44.95,24.4 v1(51,24.4)
REF_2_Secondary: R46.1 R47.2 U18.3 | length 32.4
  Top Layer w0.4: v1(16.825,21.725) 16.837,21.713 21.129,21.713 21.267,21.85 v1(21.375,21.85) 24.05,24.525 36.371,24.525 36.596,24.3 v1(40.175,24.3)
  Bottom Layer w0.4: v1(16.825,21.725) 16.863,21.688 16.863,19.137 R46.1 ; v1(21.375,21.85) 21.388,21.837 21.388,19.112 R47.2 ; U18.3 v1(40.175,24.3)
Sgn_In: J3.2 U4.4 U5.4 U6.4 U7.4 U8.4 U10.4 | length 107.9
  Top Layer w0.4: U10.4 71.05,12.465 70.6,12.915 70.6,19.315 71.375,20.09 U6.4 79.41,20.09 80.9,18.6 v1(86.706,18.6) ; U4.4 77.855,42.545 80.377,40.023 80.377,35.753 J3.2
  Bottom Layer w0.4: U8.4 74.825,9.925 75.6,10.7 ; U5.4 75.15,17.55 75.6,17.1 75.6,10.7 ; U7.4 81.795,40.005 84.8,37 84.8,31.33 87.123,29.007 88.459,27.671 88.459,20.353 v1(86.706,18.6) 78.806,10.7 75.6,10.7
Sgn_Out: J3.3 R5.2 R6.2 U5.3 U6.3 U8.3 U10.3 | length 67.5
  Top Layer w0.4: U10.3 74.825,9.925 75.6,10.7 75.6,17.1 75.15,17.55 ; U6.3 75.15,17.55 ; v1(79.55,17.55) 75.15,17.55 ; R6.2 82.068,32.332 82.068,31.384 87.005,26.448 J3.3
  Bottom Layer w0.4: U8.3 71.05,12.465 70.6,12.915 70.6,19.315 71.375,20.09 U5.3 81.49,20.09 ; v1(79.55,17.55) 81.49,19.49 81.49,20.09 ; R5.2 82,31.13 J3.3 87.005,25.692 86.534,25.221 86.534,25.134 81.49,20.09
pads on no net: J1.A J2.A J3.A U13.4 U17.4

## Polygon pours and split planes (outlines as drawn)
"DC/DC GND" on Bottom Layer "NONET_L-01_P-001" (solid, remove dead copper, pour order 1): 77.725,52.975 95,52.975 95,0 70.425,0 70.425,60.275
"DC/DC GND" on Top Layer "NONET_L-01_P-001" (solid, remove dead copper, pour order 0): 77.725,52.975 95,52.975 95,0 70.35,0 70.35,60.35

## Silkscreen, mask and mechanical layers (free items; w line width, h text height)
Top Overlay:
  lines w0.5: 55.8,1.025 55.8,16.75 55.8,33.5 55.8,52.175 ; 77.7,1.025 77.7,16.75 77.7,52.15
  text "LV" at 84,8 h5
  text "TS" at 45,7 h5
Mechanical 1:
  the board outline again, w0.254